# Altium PCB 心率血氧.PcbDoc
Units mil, origin at the board's own origin, x right, y up, seen from the top; angles counter-clockwise.
Board outline 3593.31 x 3593.31 mil, 2 copper layers (Top Layer, Bottom Layer); 57 components, 44 nets, 214 pads, 46 vias.
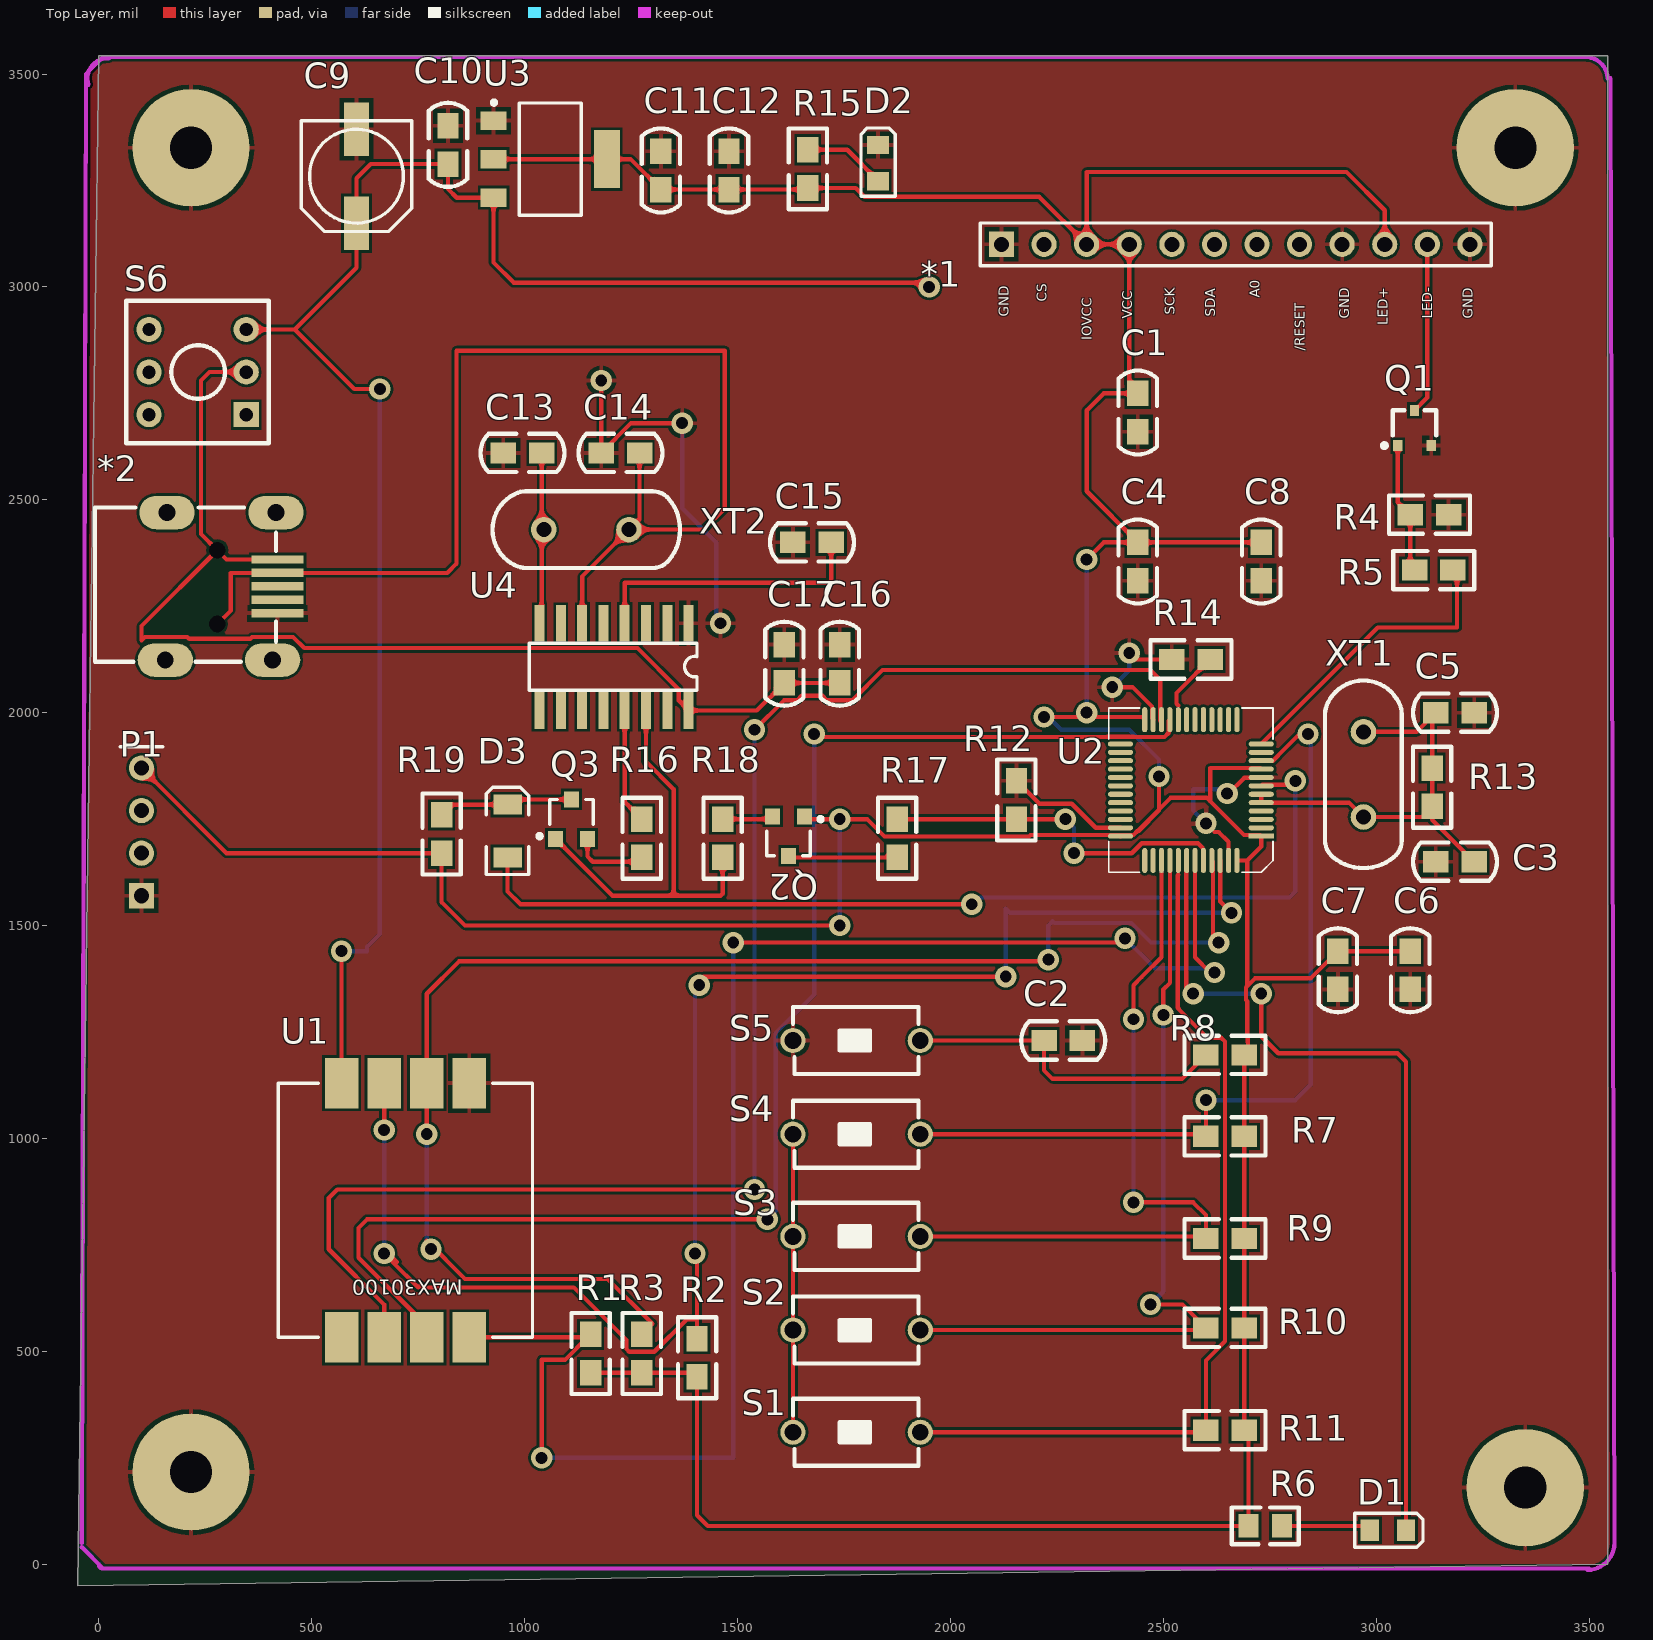
[diagram p0: Top Layer view]
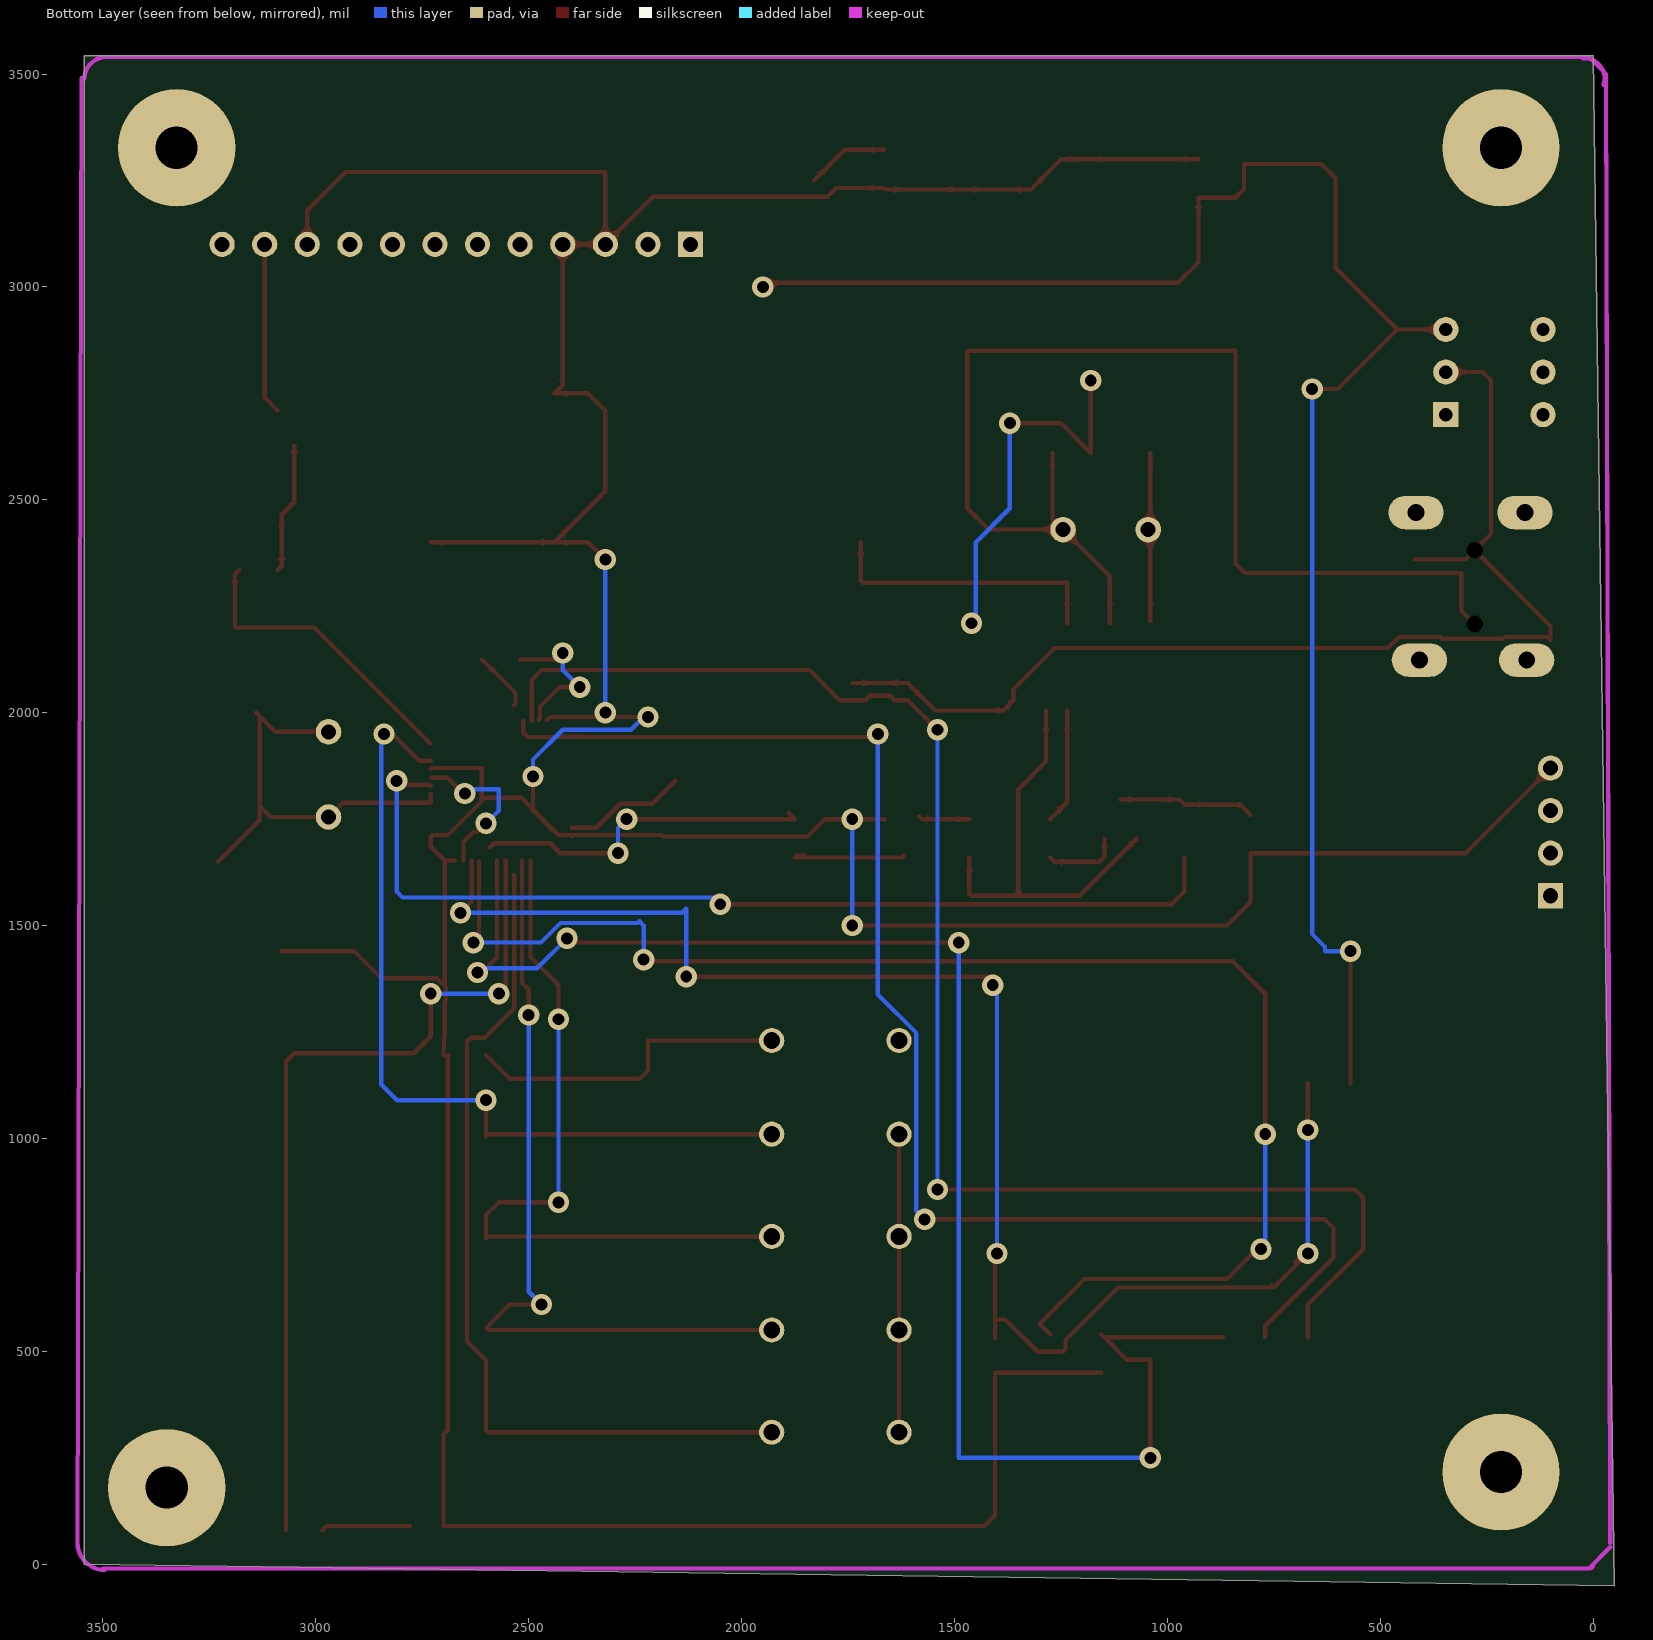
[diagram p1: Bottom Layer view, seen from below]

## Layer stack, top to bottom
Top Solder: solder mask 0.4, Solder Resist, Dk 3.5
Top Layer: signal copper 1.4
Dielectric 1: dielectric 12.6, FR-4, Dk 4.8
Bottom Layer: signal copper 1.4
Bottom Solder: solder mask 0.4, Solder Resist, Dk 3.5

## Board outline
-50,-50 0,3543.31 3543.31,3543.31 3543.31,0

## Design rules (kind name [scope] priority, off if disabled: settings)
Clearance [All] p1: gap=6
Height [All] p1: minheight=0 maxheight=99999 prefheight=500
PolygonConnect [All] p1: connectstyle=Relief reliefconductorwidth=10 reliefentries=4 polygonreliefangle="90 Angle" airgapwidth=10
RoutingVias [All] p1: holewidth=28 width=50 viastyle="Through Hole" minholewidth=28 minwidth=50 maxholewidth=28 maxwidth=50
SilkToSilkClearance [All] p1: silktosilkclearance=0
SilkToSolderMaskClearance [IsPad] p1: minsilkscreentomaskgap=0 clearancetoexposedcopper=TRUE
SolderMaskExpansion [All] p1: expansion=4
UnpouredPolygon [All] p1: allowunpoured=FALSE
Width [All] p1: maxlimit=40 minlimit=10 preferedwidth=10 minimp=50.000000 maximp=50.000000 favimp=50.000000
26 further rules are at their usual default settings.

## Classes and differential pairs
component class 心率血氧检测仪: *2 C9 C10 C11 C12 C13 C14 C15 C16 C17 D2 D3 Q2 Q3 R15 R16 R17 R18 R19 S6 U3 U4 XT2
component class 心率血氧检测仪2: C2 C3 C4 C5 C6 C7 C8 D1 P1 R6 R7 R8 R9 R10 R11 R12 R13 R14 S1 S2 S3 S4 S5 U2 XT1
component class 心率血氧检测仪1: *1 C1 Q1 R1 R2 R3 R4 R5 U1

## Components (designator, comment, footprint, x,y, rotation, side; value= is the part's Value field where it differs from the comment)
*1 "self-1.8寸" "self-1.8 - 1" 2680,2240 r180 top
*2 "CN1 Micro_USB" USB 160,2470 r270 top
C1 "Cap" 0805C 2440,2660 r90 top
C2 "Cap" 0805C 2310,1230 r180 top
C3 "Cap" 0805C 3140,1650 r0 top
C4 "Cap" 0805C 2440,2310 r90 top
C5 "Cap" 0805C 3230,2000 r180 top
C6 "Cap" 0805C 3080,1350 r90 top
C7 "Cap" 0805C 2910,1350 r90 top
C8 "Cap" 0805C 2730,2310 r90 top
C9 "Cap Pol1" CAP6.5X6.5 740,3180 r90 top
C10 "Cap" 0805C 820,3288.59 r90 top
C11 "Cap" 0805C 1320,3228.59 r90 top
C12 "Cap" 0805C 1480,3228.59 r90 top
C13 "Cap" 0805C 950,2610 r0 top
C14 "Cap" 0805C 1180,2610 r0 top
C15 "Cap" 0805C 1630,2400 r0 top
C16 "" 0805C 1740,2070 r90 top
C17 "Cap" 0805C 1610,2070 r90 top
D1 "LED0" LED_0805 3025,80 r0 top
D2 "LED" LED_0805 1830,3288.29 r90 top
D3 "IN4148" DO-213AA 960,1660 r90 top
P1 "Header 4" HDR1X4 100,1570 r90 top
Q1 "2N3904" 三极管SOT23 3090,2710 r0 top
Q2 "PNP" SOT-23 1620,1710 r180 top
Q3 "NPN" SOT-23 1110,1750 r0 top
R1 "Res2" 0805 1200,400 r90 top
R2 "Res2" 0805 1450,390 r90 top
R3 "Res2" 0805 1320,400 r90 top
R4 "Res2" 0805 3220,2510 r180 top
R5 "Res2" 0805 3040,2290 r0 top
R6 "Res Semi" 电阻0805 2700,90 r0 top
R7 "Res2" 0805 2550,960 r0 top
R8 "Res2" 0805 2550,1151.26 r0 top
R9 "Res2" 0805 2550,720 r0 top
R10 "Res2" 0805 2550,510 r0 top
R11 "Res2" 0805 2550,270 r0 top
R12 "Res2" 0805 2110,1890 r270 top
R13 "Res2" 0805 3176.36,1730 r90 top
R14 "Res2" 0805 2660,2170 r180 top
R15 "Res Adj1" 0805 1710,3182.23 r90 top
R16 "Res2" 0805 1230,1800 r270 top
R17 "Res2" 0805 1830,1800 r270 top
R18 "Res2" 0805 1420,1800 r270 top
R19 "Res2" 0805 760,1810 r270 top
S1 "SW-PB" 2脚按键#1 1630,310 r180 top
S2 "SW-PB" 2脚按键#1 1630,550 r180 top
S3 "SW-PB" 2脚按键#2 1630,770 r180 top
S4 "SW-PB" 2脚按键#1 1630,1010 r180 top
S5 "SW-PB" 2脚按键#1 1630,1230 r180 top
S6 "SW-SPDT" BTN8*8 350,2700 r0 top
U1 "MAX30100" MAX30100模块 870,1130 r180 top
U2 "STM32F103C8T6" LQFP48 2730,1710 r180 top
U3 "AMS1117-3.3" SOT-223 1060,3300 r270 top
U4 "CH340" SOP16 1010,2160 r270 top
XT1 "XTAL" HC-49S 2960,1630 r0 top
XT2 "XTAL" HC-49S 1370,2420 r90 top

## Footprints (in the part's own frame and the unit in brackets; to place one, negate y for a bottom-side part, rotate by r counter-clockwise, add the part's x,y. Pads: shape width x height; smd on the part's side, far side on the other; paste and mask are expansions set on the pad)
2脚按键#1 [mm]
  round 1.5 hole 1: 1(0,0) 2(-7.6,0)
  silkscreen extent -7.5,-2 0,2
2脚按键#2 [mm]
  round 1.5 hole 1 mask+0.254: 1(0,0)
  round 1.5 hole 1: 2(-7.6,0)
  silkscreen extent -7.5,-2 0,2
0805 [mil]
  rect 60x50 smd: 1(50,45) 2(140,45)
  silkscreen extent 0,0 190,90
0805C [mil]
  rect 60x50 smd: 1(0,0) 2(90,0)
  silkscreen extent -54,-45 144,45
BTN8*8 [mm]
  rect 1.5x1.5 hole 0.8: 1(-0.1,0)
  round 1.5 hole 0.8: 2(-0.1,2.54) 3(-0.1,5.08) 4(-5.9,5.08) 5(-5.9,2.54) 6(-5.9,0)
  silkscreen extent -7.25,-1.71 1.25,6.79
CAP6.5X6.5 [mm]
  rect 3.2x1.5 smd: 1(-0.768,3.429) 2(4.832,3.429)
  silkscreen extent -1.27,0.13 5.33,6.73
DO-213AA [mm]
  rect 1.2x1.7 smd: 1(0,0) 2(3.15,0)
  silkscreen extent -1.02,-1.27 4.19,1.27
HC-49S [mil]
  round 60 hole 35: 1(10,325) 2(10,125)
  silkscreen extent -80,5 100,446
HDR1X4 [mm] "Connector; Header; 4 Position"
  rect 1.5x1.5 hole 0.9: 1(0,0)
  round 1.5 hole 0.9: 2(2.54,0) 3(5.08,0) 4(7.62,0)
  silkscreen extent 8.89,-1.27 8.89,1.27
LED_0805 [mm] "贴片二极管"
  rect 1.1x1.3 smd: 1(-1.016,0) 2(1.143,0)
  silkscreen extent -1.91,-1.02 2.16,1.02
LQFP48 [mm]
  rect 1.5x0.3 smd: 1(0,0)
  oval 1.5x0.3 smd: 2(0,-0.5) 3(0,-1) 4(0,-1.5) 5(0,-2) 6(0,-2.5) 7(0,-3) 8(0,-3.5) 9(0,-4) 10(0,-4.5) 11(0,-5) 12(0,-5.5) 25(8.4,-5.5) 26(8.4,-5) 27(8.4,-4.5) 28(8.4,-4) 29(8.4,-3.5) 30(8.4,-3) 31(8.4,-2.5) 32(8.4,-2) 33(8.4,-1.5) 34(8.4,-1) 35(8.4,-0.5) 36(8.4,0)
  oval 0.3x1.5 smd: 13(1.45,-6.95) 14(1.95,-6.95) 15(2.45,-6.95) 16(2.95,-6.95) 17(3.45,-6.95) 18(3.95,-6.95) 19(4.45,-6.95) 20(4.95,-6.95) 21(5.45,-6.95) 22(5.95,-6.95) 23(6.45,-6.95) 24(6.95,-6.95) 37(6.95,1.45) 38(6.45,1.45) 39(5.95,1.45) 40(5.45,1.45) 41(4.95,1.45) 42(4.45,1.45) 43(3.95,1.45) 44(3.45,1.45) 46(2.45,1.45) 47(1.95,1.45) 48(1.45,1.45)
  oval 0.3x1.5 smd mask+0.254: 45(2.95,1.45)
  silkscreen extent -0.7,-7.65 9.1,2.15
MAX30100模块 [mm]
  rect 2x3 smd: 1(0,0) 2(2.54,0) 3(5.08,0) 4(7.62,0) 5(7.62,15.164) 6(5.08,15.164) 7(2.54,15.164) 8(0,15.164)
  silkscreen extent -3.77,0 11.39,15.16
"self-1.8 - 1" [mm]
  rect 1.5x1.5 hole 0.9: 1(14.224,-21.844)
  round 1.5 hole 0.9: 2(11.684,-21.844) 3(9.144,-21.844) 4(6.604,-21.844) 5(4.064,-21.844) 6(1.524,-21.844) 7(-1.016,-21.844) 8(-3.556,-21.844) 9(-6.096,-21.844) 10(-8.636,-21.844) 11(-11.176,-21.844) 12(-13.716,-21.844)
  silkscreen extent -14.99,-23.11 15.49,-20.57
SOP16 [mm]
  rect 2.2x0.6 smd: 1(-1.27,9.525) 2(-1.27,8.255) 3(-1.27,6.985) 4(-1.27,5.715) 5(-1.27,4.445) 6(-1.27,3.175) 7(-1.27,1.905) 8(-1.27,0.635) 9(3.93,0.635) 10(3.93,1.905) 11(3.93,3.175) 12(3.93,4.445) 13(3.93,5.715) 14(3.93,6.985) 15(3.93,8.255) 16(3.93,9.525)
  silkscreen extent -0.07,0.03 2.73,10.02
SOT-23 [mm]
  rect 0.9x0.95 smd: 1(-0.95,-1.175) 2(0.95,-1.175) 3(0,1.175)
  silkscreen extent -2.03,-1.14 1.3,1.18
SOT-223 [mm]
  rect 1.1x1.55 smd: 1(-2.3,-3.375) 2(0,-3.375) 3(2.3,-3.375)
  rect 3.45x1.55 smd: 4(0,3.375)
  silkscreen extent -3.5,-3.48 3.35,1.85, body extent -3.3,-3.94 3.3,3.43, height 0.8
USB [mm]
  round 0.9 hole 1: 1(2.25,3) 2(6.65,3)
  rect 0.5x3.1 smd mask+0.254: 1(2.8,6.6) 3(4.4,6.6) 4(5.2,6.6)
  rect 0.5x3.1 smd: 2(3.6,6.6) 5(6,6.6)
  oval 2x3.3 hole 1: 6(0,6.5) 7(0,0) 8(8.8,-0.1) 9(8.8,6.3)
  silkscreen extent -0.3,-4.3 8.9,6.5
三极管SOT23 [mm]
  rect 0.55x0.65 smd: 1(0,0) 2(-1,-2.1) 3(1,-2.1)
  silkscreen extent -1.94,-2.24 1.3,0
电阻0805 [mm]
  rect 1.2x1.4 smd: 1(0,0) 2(2,0)
  silkscreen extent -1,-1.1 3,1.1

## Part data
C1 C2 C3 C4 C5 C6 C7 C8 C10 C11 C12 C13 C14 C15 C17: "Capacitor"
C9: "Polarized Capacitor (Radial)"
C16: library part Cap, "Capacitor"
D1: "Typical INFRARED GaAs LED"
D2: library part LED0, "Typical INFRARED GaAs LED"
D3: library part Diode, "Default Diode"
Q1: "NPN General Purpose Amplifier"
Q2: library part 2N3906, "PNP General Purpose Amplifier"
Q3: library part 2N3904, "NPN General Purpose Amplifier"
R1 R2 R3 R4 R5 R7 R8 R9 R10 R11 R12 R13 R14 R16 R17 R18 R19: "Resistor"
R6: "Semiconductor Resistor"
R15: "Variable Resistor"
S1 S2 S3 S4 S5: "Switch"
S6: "SPDT Subminiature Toggle Switch, Right Angle Mounting, Vertical Actuation"
XT1 XT2: "Crystal Oscillator"

## Free pads (board coordinates)
  round 275.59 hole 99: 0(216.54,216.54) 1(216.54,3326.77) 2(3326.77,3326.77) 3(3350,180)

## Via types
v1: diameter 50, hole 28, Top Layer to Bottom Layer, 46 vias

## Nets (pads, with @x,y where several pads share a name; then routed paths per layer and width w, separated by ;. In a path a pad name is that pad's centre, name@x,y a point inside that pad or via, vN(x,y) a via of type N, cw(c..) or ccw(c..) an arc to the next point about the centre after c; other vN are vias at no path point)
BOOT0: R12.2 R17.1 U2.44 | length 799.7
  Top Layer w10: R17.1@1890,1765 R17.1 R12.2 v1@2260,1750 ; v1(2290,1670) 2425.94,1670 2449.38,1693.44 2581.49,1693.44 2591.39,1683.54
  Bottom Layer w10: v1(2270,1750) 2290,1730 v1@2290,1680
D+: *2.3
D-: *2.2 C14.2 U4.6 XT2.2 | length 2873.9
  Top Layer w10: *2.2@278.11,2208.19 310,2240.08 310,2328.27 419.84,2328.27 818.27,2328.27 840,2350 840,2850 1470,2850 1470,2480 1420,2430 XT2.2 ; U4.6 1135,2320 XT2.2 ; C14.2 1270,2455 XT2.2
GND: *1.1 *1.9 *1.12 *2.5 C1.1 C2.1 C3.1 C4.1 C5.1 C6.1 C7.1 C8.1 C9.2 C10.2 C11.2 C12.2 C13.1 C14.1 C15.1 C16.2 C17.2 D2.2 P1.1 pad.0 pad.1 pad.2 pad.3 Q1.3 R4.1 R12.1 R14.2 S5.1 U1.1 U2.8 U2.23 U2.35 U2.47 U3.1 U4.1 | length 1876.6
  Top Layer w10: v1(1180,2780) C14.1 1250,2680 v1(1370,2680) ; R12.1 2209,1786 2284.91,1786 2341.23,1729.69 U2.35 ; v1(2380,2060) 2427.53,2060 2473.28,2014.25 2473.28,1986.4 U2.23 ; v1@2435,2125 R14.2 ; 2620,1720 2630,1720 2653.23,1696.77 U2.47 ; v1(2650,1810) 2653.16,1810 2690.05,1846.89 2729.09,1846.89 U2.8
  Bottom Layer w10: v1(1370,2680) 1370,2480 1450,2400 1450,2220 v1(1460,2210) ; v1(2380,2060) 2420,2100 v1(2420,2140) ; v1(2600,1740) 2570,1770 2570,1820 v1@2660,1820
K2: R7.1 S4.2 U2.10 | length 1954.6
  Top Layer w10: S4.2 R7.1@2595,1010 ; R7.1 v1@2600,1070 ; U2.10 2757.85,1887.16 2770.53,1899.85 2770.53,1900.53 2820,1950 v1(2840,1950)
  Bottom Layer w10: v1(2600,1090) 2810,1090 2846,1126 2846,1944 v1(2840,1950)
K3: R9.1 S3.2 U2.39 | length 1741.6
  Top Layer w10: S3.2 R9.1@2595,770 ; v1(2430,850) 2570,850 2600,820 R9.1 ; v1(2430,1280) 2430,1360 2450,1380 2495.75,1425.75 U2.39
  Bottom Layer w10: v1(2430,850) 2440,860 2430,870 v1(2430,1280)
K4: R10.1 S2.2 U2.40 | length 1880.3
  Top Layer w10: S2.2 R10.1@2595,550 ; v1(2470,610) 2545,610 R10.1 ; v1(2500,1290) 2500,1350 2515.43,1365.43 U2.40
  Bottom Layer w10: v1(2470,610) 2500,640 v1(2500,1290)
K5: R11.1 S1.2 U2.41 | length 2054.3
  Top Layer w10: S1.2 R11.1@2595,310 ; 2535.12,1619.41 2534,1618.29 2534,1306.91 2536,1304.91 2536,1304 2603.74,1236.26 2636.21,1236.26 2645,1227.47 2645,523.79 2600,478.79 R11.1
LED: D1.2 U2.42 | length 2034.1
  Top Layer w10: U2.42 2554,1652.11 2554,1356 v1@2562.5,1347.5 ; v1(2730,1340) 2730,1240 2770,1200 3050,1200 3070,1180 D1.2
  Bottom Layer w10: v1(2570,1340) v1(2730,1340)
LIGHTCTRL: R5.2 U2.12 | length 710.7
  Top Layer w10: U2.12@2731.22,1927.76 3003.47,2200 3190,2200 3190,2325 R5.2
M_INT: R1.2 U1.8 U2.43 | length 3729.5
  Top Layer w10: U1.8 R1.2@1147.99,532.99 ; v1(1040,250) 1040,480 1095,480 R1.2@1147.99,532.99 ; R1.2 R1.2@1147.99,532.99 ; v1(1490,1460) v1@2410,1460 ; U2.43 2574.49,1425.51 2610,1390 v1(2620,1390)
  Bottom Layer w10: v1(1040,250) 1490,250 v1(1490,1460) ; v1(2410,1470) 2480,1400 2595,1400
M_IR: U1.7 U2.21 | length 3344.9
  Top Layer w10: U1.7 770,560 610,720 610,790 630,810 v1(1570,810) ; v1(1680,1950) 1686.91,1943.09 2368.32,1943.09 2368.67,1943.44 2429.92,1943.44 2430.26,1943.09 2502.75,1943.09 2512.65,1953 U2.21@2512.65,1980.84
  Bottom Layer w10: v1(1570,810) 1589.47,829.47 1589.47,1247.31 1680,1337.84 v1(1680,1950)
M_R: U1.6 U2.22 | length 3573.2
  Top Layer w10: U1.6 670,610 540,740 540,860 560,880 1510,880 ; v1(1540,1960) 1609,2029 1639.56,2029 1650.56,2040 1699.44,2040 1710.44,2029 1769.56,2029 1840.56,2100 2470,2100 2492.97,2077.03 U2.22@2492.97,1980.84
  Bottom Layer w10: v1(1540,880) 1540,1940 1550,1950 v1(1540,1960)
M_SCL: R3.2 U1.2 U2.45 | length 3432.3
  Top Layer w10: v1@770,760 860,670 1195,670 1300,565 R3.2 ; v1@770,1020 U1.2 770,1340 846,1416 2226,1416 v1(2230,1420) ; v1@2616.64,1463.36 U2.45@2616.64,1650.13 ; v1@2620,1463.36 2623.36,1460 v1(2630,1460)
  Bottom Layer w10: v1@770,740 v1(770,1010) ; v1(2230,1420) 2230,1500 2240,1510 2244,1506 2424.91,1506 2470.91,1460 v1(2630,1460)
  other v1: 780,740
M_SDA: R2.2 U1.3 U2.46 | length 3600
  Top Layer w10: v1@670,740 700,710 ; v1@670,1040 U1.3 ; 690,710 750,650 ; 755,655 760,650 1115.56,650 1239,526.56 1239,505.44 1245.44,499 1304.56,499 1380.56,575 1405,575 ; R2.2 1405,575 ; v1@1405,715 1405,575 ; v1@1405,1365 1420,1380 v1@2120,1380 ; U2.46 2633.54,1556.46 v1(2660,1530)
  Bottom Layer w10: v1(670,730) v1(670,1020) ; v1(1400,730) v1@1400,1350 ; v1(2130,1380) 2130,1540 2140,1530 v1@2640,1530
  other v1: 1410,1360
Net*1_11: *1.11 Q1.1 | length 402.4
  Top Layer w10: Q1.1 3120,2740 *1.11
NetC2_2: C2.2 R8.1 S5.2 | length 772.4
  Top Layer w10: S5.2 C2.2 2220,1160 2240,1140 2543.74,1140 R8.1
NetC3_2: C3.2 C5.2 R13.1 R13.2 U2.5 U2.6 XT1.1 XT1.2 | length 1016.2
  Top Layer w10: U2.6 U2.5 2936.26,1788.74 XT1.2 3106.36,1755 R13.1 ; XT1.1 3095,1955 C5.2@3131.36,1991.36 ; C5.2 C5.2@3131.36,1991.36 ; C3.2 3131.36,1748.64 R13.1 ; R13.1 R13.2 C5.2@3131.36,1991.36
NetC13_2: C13.2 U4.8 XT2.1 | length 395
  Top Layer w10: U4.8@1040,2215 C13.2
NetC15_2: C15.2 U4.4 | length 672.1
  Top Layer w10: U4.4 1235,2305 1715,2305 1720,2310 C15.2
NetD1_1: D1.1 R6.2 | length 210.4
  Top Layer w10: R6.2 2975,90 D1.1
NetD2_1: D2.1 R15.2 | length 194.9
  Top Layer w10: R15.2 1757.77,3322.23 D2.1@1830,3250
NetD3_2: D3.2 Q3.3 R19.1 | length 320
  Top Layer w10: R19.1 829.02,1784.02 D3.2 972.24,1796.26 Q3.3
NetQ1_2: Q1.2 R4.2 R5.1 | length 308.6
  Top Layer w10: Q1.2 3050.63,2494.37 R4.2 3080,2345 R5.1
NetQ2_2: Q2.2 R18.1 | length 120.2
  Top Layer w10: R18.1 1576.34,1750 Q2.2
NetQ2_3: Q2.3 R17.2 | length 289.3
  Top Layer w10: Q2.3 1620,1660 R17.2@1855,1660 ; R17.2@1855,1660 1851.26,1663.74 1871.26,1663.74 R17.2 R17.2@1855,1660
NetQ3_1: Q3.1 R18.2 U4.14 | length 997.1
  Top Layer w10: Q3.1 1206.34,1570 1350,1570 ; U4.14 1285,1885 1350,1820 1350,1570 ; R18.2 1465,1575 1460,1570 1350,1570
NetQ3_2: Q3.2 R16.2 | length 178.1
  Top Layer w10: Q3.2 1147.4,1662.6 1160,1650 1265,1650 R16.2
NetR14_1: R14.1 U2.20 | length 142.2
  Top Layer w10: 2535.12,2017.12 2531.12,2021.12 2531.12,2046.12 R14.1
NetR16_1: R16.1 U4.13 | length 271.8
  Top Layer w10: U4.13 1235,1790 R16.1
NetS1_1: S1.1 S2.1 S3.1 S4.1 | length 700
  Top Layer w10: S1.1 S2.1 S3.1 S4.1
"OLED CS": U2.19
"OLED D/C": U2.14
"OLED RES": U2.13
"OLED S1": U2.17
"OLED SCL": U2.15
RST: D3.1 U2.7 | length 2289.8
  Top Layer w10: D3.1 960,1580 990,1550 v1(2050,1550) ; U2.7 2732.78,1830.89 2790.89,1830.89 2800,1840 v1(2810,1840)
  Bottom Layer w10: v1(2050,1550) 2066,1566 2796,1566 2810,1580 v1@2810,1830
RXD: U2.31
SWCLK: U2.37
SWDIO: U2.34
TXD: U2.30
VCC_3.3V: *1.3 *1.4 *1.10 C1.2 C4.2 C6.2 C7.2 C8.2 C11.1 C12.1 P1.4 Q2.1 R1.1 R2.1 R3.1 R6.1 R7.2 R8.2 R9.2 R10.2 R11.2 R15.1 R19.2 U2.1 U2.9 U2.24 U2.36 U2.48 U3.2 U3.4 | length 12385.5
  Top Layer w10: P1.4 300,1670 R19.2 805,1555 860,1500 v1(1740,1500) ; U3.2 U3.4 1248.59,3300 C11.1 C12.1 R15.1@1661.36,3228.59 ; R1.1 R3.1 R2.1@1405,450 ; R2.1 1405,115 1430,90 R6.1 2700,305 R11.2 R10.2 R9.2 R7.2 R8.2 ; Q2.1@1663.66,1750 v1(1740,1750) 1804.44,1750 1845.44,1709 2184.56,1709 2188.34,1712.78 U2.36@2402.07,1712.78 ; R15.1 1777.61,3232.23 1798.2,3211.64 2208.36,3211.64 *1.3 ; v1(2220,1990) 2450,1990 U2.24 ; v1(2320,2360) 2360,2400 C4.2 ; U2.36 U2.36@2402.07,1712.78 ; v1(2490,1850) 2490,1770 2442.86,1722.86 2440,1722.86 2429.92,1712.78 ; U2.48 2697.09,1652.91 ; R8.2@2700,1196.26 2699.97,1196.78 2697.09,1251.98 2697.09,1322 2694,1325.09 2694,1354.91 2697.09,1358 ; U2.9 2727.48,1870 2610,1870 2610,1792.25 ; C8.2 C4.2 ; *1.10 3020,3180 2930,3270 2320,3270 *1.3 ; C6.2 C7.2 2846,1376 2715.09,1376 2697.09,1358 ; *1.3 *1.4 2420,2770 C1.2 2360,2750 2320,2710 2320,2520 C4.2 ; U2.36@2402.07,1712.78 2429.92,1712.78 ; 2429.92,1712.78 2517.14,1800 2602.25,1800 2610,1792.25 ; 2610,1792.25 2689.47,1712.78 2727.22,1712.78 U2.1 2730,1685.83 2697.09,1652.91 ; 2697.09,1358 2697.09,1652.91
  Bottom Layer w10: v1(1740,1500) v1(1740,1750) ; v1@2220,1980 2240,1980 2260,1960 2420,1960 2490,1890 v1(2490,1850) ; v1(2320,2000) v1(2320,2360)
VCC_5V: C9.1 C10.1 S6.3 U1.4 U3.3 | length 4067.3
  Top Layer w10: S6.3 460,2900 ; U1.4 v1@570,1430 ; v1(660,2760) 600,2760 460,2900 ; v1@1940,3010 974.25,3010 927.13,3057.13 U3.3 840.55,3209.45 820,3230 C10.1 638.59,3288.59 605,3255 C9.1 605,3045 460,2900
  Bottom Layer w10: v1(570,1440) 630,1440 630,1450 660,1480 v1(660,2760)
  other v1: 1950,3000
VUSB: *2.1 C16.1 C17.1 S6.2 U4.16 | length 2725.2
  Top Layer w10: S6.2 260,2800 240,2780 240,2419.53 *2.1@278.11,2381.42 ; *2.1@419.84,2359.76 299.76,2359.76 *2.1@278.11,2381.42 ; C16.1 C17.1 1545.28,2005.28 U4.16 1361.81,2028.46 1361.81,2054.8 1264.91,2151.69 482.36,2151.69 456.14,2177.91 359.92,2177.91 355.51,2173.5 212.09,2173.5 207.68,2177.91 107.95,2177.91 100.04,2170 100.04,2203.35 *2.1@278.11,2381.42
pads on no net: *1.2 *1.5 *1.6 *1.7 *1.8 *2.4 *2.6 *2.7 *2.8 *2.9 P1.2 P1.3 S6.1 S6.4 S6.5 S6.6 U1.5 U2.2 U2.3 U2.4 U2.11 U2.16 U2.18 U2.25 U2.26 U2.27 U2.28 U2.29 U2.32 U2.33 U2.38 U4.2 U4.3 U4.5 U4.7 U4.9 U4.10 U4.11 U4.12 U4.15

## Polygon pours and split planes (outlines as drawn)
GND on Top Layer "Top Layer-No Net" (solid, remove dead copper, pour order 6): -520,4140 -290,3910 4600,3910 4600,-2480 4550,-2530 4540,-2540 -740,-2540 -740,3960 -670,4030 -550,3910 -290,3910 -270,3890

## Keep-outs
Keep-Out Layer:
  lines w10: -40,40.12 10,-9.88 3500,-9.88 ; -40,50 -40,120 -30,3500.09 10,3540.09 3491.65,3540.09 ; -24.16,3474.65 cw(c20,3490) 23.37,3536.63 ; 0,0 ccw(c9.88,0) 9.88,-9.88 ; 3490,3540 cw(c3491.65,3488.35) 3543.31,3490 ; 3496.15,-13.31 ccw(c3496.15,50) 3559.46,50 ; 3550,3490 3559.49,40.05

## Silkscreen, mask and mechanical layers (free items; w line width, h text height)
Mechanical 1:
  lines w10: -40,50 ccw(c24.94,55.06) 30,-9.88

## Text inside footprints (layer, text, board x,y; h text height)
*1: Top Overlay "GND" at 2145,2930 h40 r90; Top Overlay "GND" at 2945,2925 h40 r90; Top Overlay "LED+" at 3035,2910 h40 r90; Top Overlay "SCK" at 2535,2935 h40 r90; Top Overlay "SDA" at 2630,2930 h40 r90; Top Overlay "IOVCC" at 2340,2875 h40 r90; Top Overlay "VCC" at 2435,2925 h40 r90; Top Overlay "/RESET" at 2840,2850 h40 r90; Top Overlay "LED-" at 3140,2925 h40 r90; Top Overlay "CS" at 2235,2965 h40 r90; Top Overlay "A0" at 2735,2975 h40 r90; Top Overlay "GND" at 3235,2925 h40 r90